# Altium PCB PIAR_MainBoard.PcbDoc (part 2 of 3)
Units mil, origin at the board's own origin, x right, y up, seen from the top; angles counter-clockwise.
Board outline 3543.31 x 2165.35 mil, 2 copper layers (Top Layer, Bottom Layer), stack 61.811 mil thick; 79 components, 51 nets, 291 pads, 72 vias.
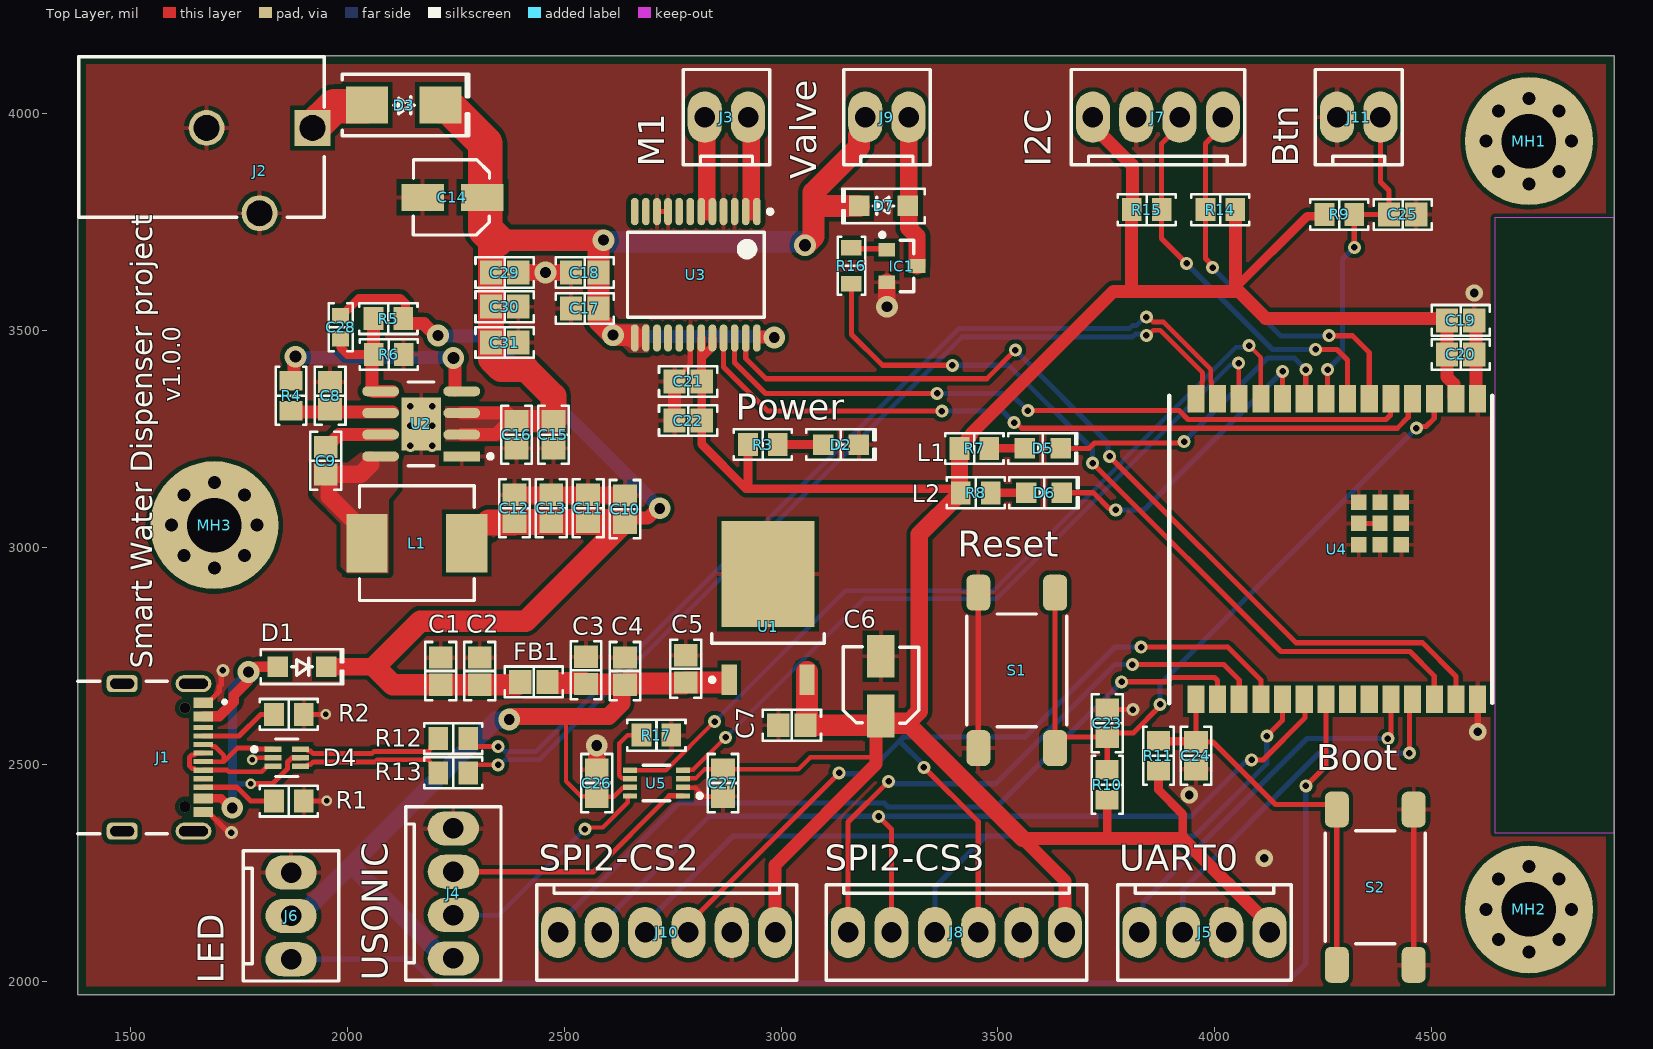
[diagram p0: Top Layer view]

## Part data (continued)
R9 R10 R11 R17: library part RNCS0805BKE10K0, "RES 10K OHM 0.1% 1/10W 0805", Device Package="0805 (2012 Metric)", Manufacturer="Stackpole Electronics Inc", Operating Temperature="-55°C ~ 155°C", Power (Watts)="0.1W, 1/10W", Ratings=AEC-Q200, Resistance="10 kOhms", Supplier Device Package=0805, Supplier Part Number 1=RNCS0805BKE10K0CT-ND, Temperature Coefficient=±25ppm/°C, Tolerance=±0.1%, ComponentLink1Description=Datasheet, ComponentLink1URL=https://www.seielect.com/catalog/sei-rncs_rnch.pdf, ComponentLink2Description="DigiKey Link", ComponentLink2URL=https://www.digikey.com/en/products/detail/stackpole-electronics-inc/RNCS0805BKE10K0/1800067, Composition="Thin Film", Features="Anti-Corrosive, Automotive AEC-Q200, Moisture Resistant", Height - Seated (Max)="0.026\" (0.65mm)", lastupdated="08/02/2024 21:02:39", Lifecycle Status=Active, Minimum Order=1, Number of Terminations=2, Package / Case="0805 (2012 Metric)", Packaging=TapeAndReel, Part Number=RNCS0805BKE10K0, Part Status=Active, partid=27713, price=0.07, Series=RNCS, Size / Dimension="0.079\" L x 0.049\" W (2.00mm x 1.25mm)", Supplier 1=DigiKey
R12 R13: library part CPF0805B22RE1, "RES SMD 22 OHM 0.1% 1/10W 0805", Device Package="0805 (2012 Metric)", Manufacturer="TE Connectivity Passive Product", Operating Temperature="-55°C ~ 155°C", Power (Watts)="0.1W, 1/10W", Resistance="22 Ohms", Supplier Device Package=0805, Supplier Part Number 1=A103179CT-ND, Temperature Coefficient=±25ppm/°C, Tolerance=±0.1%, ComponentLink1Description=Datasheet, ComponentLink1URL=https://www.te.com/commerce/DocumentDelivery/DDEController?Action=srchrtrv&DocNm=1773200&DocType=DS&DocLang=English, ComponentLink2Description="DigiKey Link", ComponentLink2URL=https://www.digikey.com/en/products/detail/te-connectivity-passive-product/CPF0805B22RE1/2381993, Composition="Thin Film", Height - Seated (Max)="0.026\" (0.65mm)", lastupdated="08/02/2024 21:02:36", Lifecycle Status=Active, Minimum Order=1, Number of Terminations=2, Package / Case="0805 (2012 Metric)", Packaging=TapeAndReel, Part Number=CPF0805B22RE1, Part Status=Active, partid=28451, price=0.12, Series="CPF, Neohm", Size / Dimension="0.079\" L x 0.049\" W (2.00mm x 1.25mm)", Supplier 1=DigiKey
R14 R15: library part RCS08054K70JNEA, "RES SMD 4.7K OHM 5% 1/2W 0805", Device Package="0805 (2012 Metric)", Manufacturer="Vishay Dale", Operating Temperature="-55°C ~ 155°C", Power (Watts)="0.5W, 1/2W", Ratings=AEC-Q200, Resistance="4.7 kOhms", Supplier Device Package=0805, Supplier Part Number 1=541-2866-1-ND, Temperature Coefficient=±200ppm/°C, Tolerance=±5%, ComponentLink1Description=Datasheet, ComponentLink1URL=http://www.vishay.com/docs/20065/rcse3.pdf, ComponentLink2Description="DigiKey Link", ComponentLink2URL=https://www.digikey.com/en/products/detail/vishay-dale/RCS08054K70JNEA/5867012, Composition="Thick Film", Features="Automotive AEC-Q200, Pulse Withstanding", Height - Seated (Max)="0.020\" (0.50mm)", lastupdated="08/02/2024 21:02:38", Lifecycle Status=Active, Minimum Order=1, Number of Terminations=2, Package / Case="0805 (2012 Metric)", Packaging=TapeAndReel, Part Number=RCS08054K70JNEA, Part Status=Active, partid=27839, price=0.02, Series="RCS e3", Size / Dimension="0.079\" L x 0.049\" W (2.00mm x 1.25mm)", Supplier 1=DigiKey
R16: library part RT0805BRD07160RL, "RES SMD 160 OHM 0.1% 1/8W 0805", Device Package="0805 (2012 Metric)", Manufacturer=Yageo, Operating Temperature="-55°C ~ 155°C", Power (Watts)="0.125W, 1/8W", Resistance="160 Ohms", Supplier Device Package=0805, Supplier Part Number 1=YAG1789CT-ND, Temperature Coefficient=±25ppm/°C, Tolerance=±0.1%, ComponentLink1Description=Datasheet, ComponentLink1URL=https://www.yageo.com/upload/media/product/productsearch/datasheet/rchip/PYu-RT_1-to-0.01_RoHS_L_11.pdf, ComponentLink2Description="DigiKey Link", ComponentLink2URL=https://www.digikey.com/en/products/detail/yageo/RT0805BRD07160RL/1075624, Composition="Thin Film", Height - Seated (Max)="0.024\" (0.60mm)", lastupdated="25/07/2024 09:20:24", Lifecycle Status=Active, Minimum Order=1, Number of Terminations=2, Package / Case="0805 (2012 Metric)", Packaging=TapeAndReel, Part Number=RT0805BRD07160RL, Part Status=Active, partid=33619, price=0.04, Series=RT, Size / Dimension="0.079\" L x 0.049\" W (2.00mm x 1.25mm)", Supplier 1=DigiKey